# EAGLE board FbLike_EP2 (EAGLE 7.2.0)
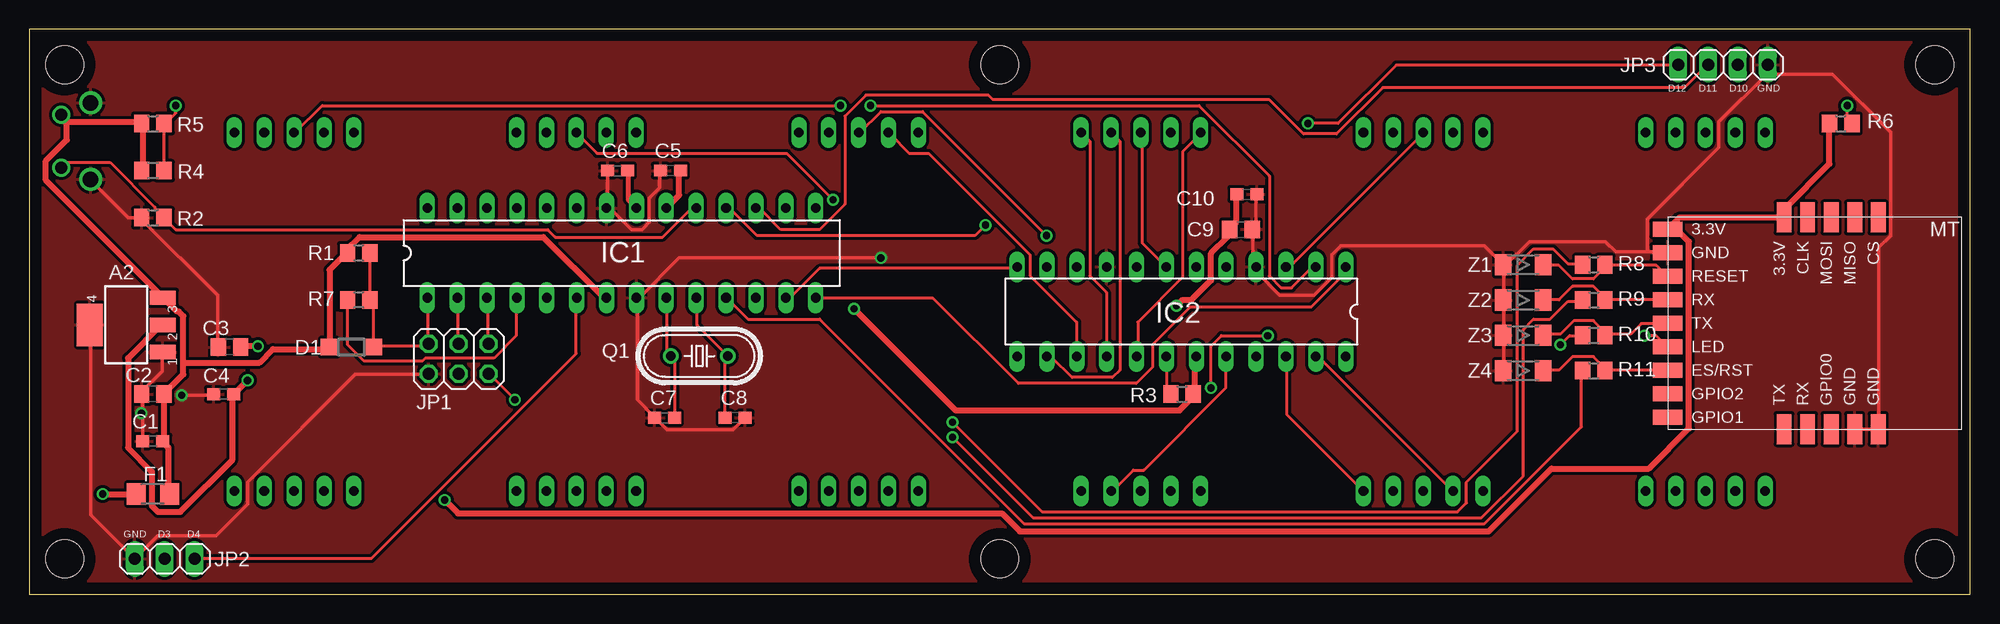
[diagram p0: board, top side]
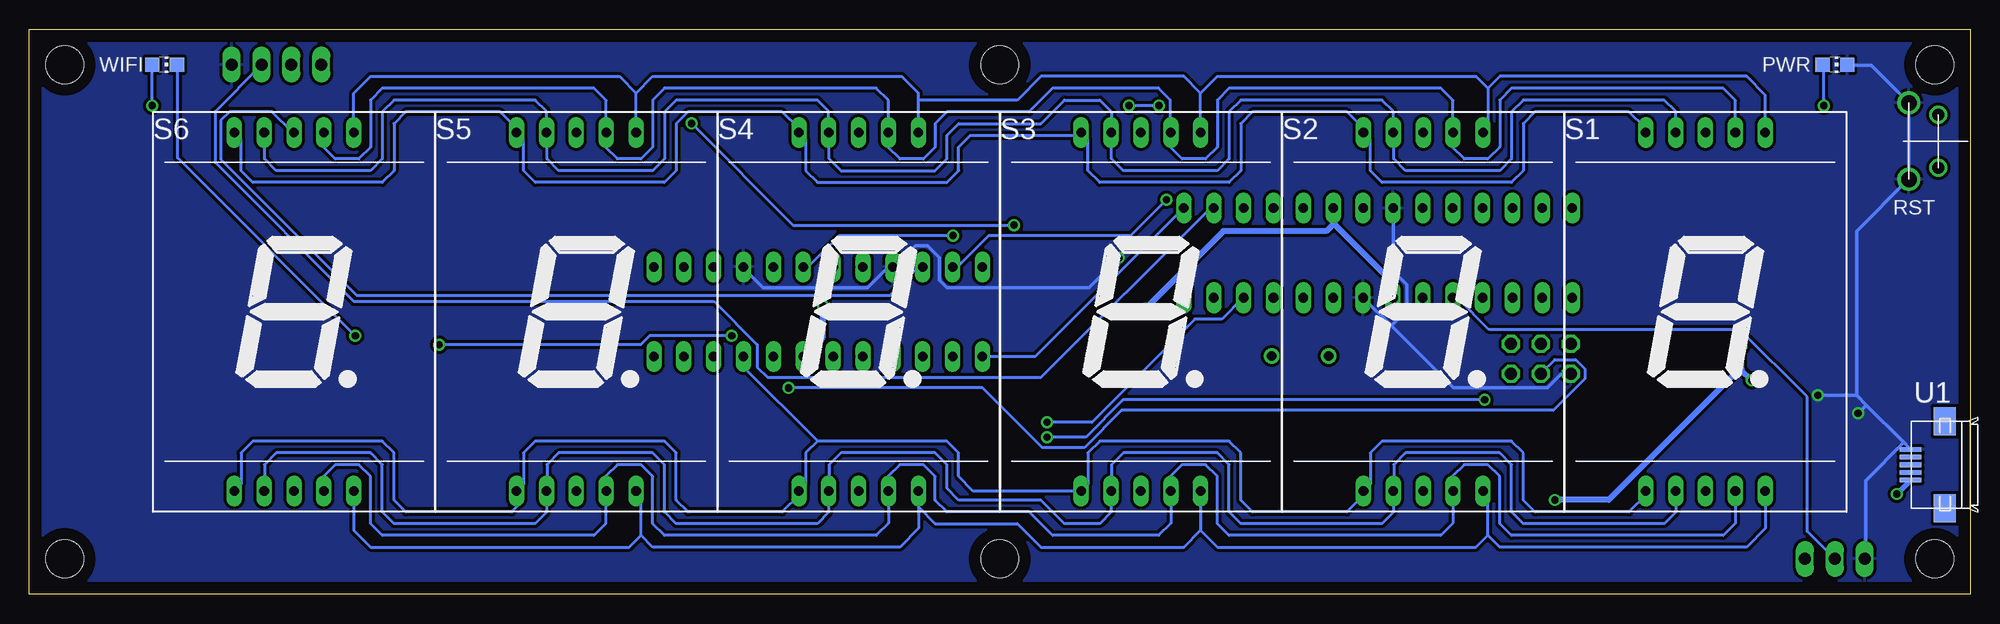
[diagram p1: board, bottom side, seen from below]

Size 165 x 48 mm. Coordinates in mm from the lower left corner, seen from the top.
Outline: 165,0 165,48 0,48 0,0 165,0
Copper layers (1*16): Top 0.035mm / dielectric 1.5mm / Bottom 0.035mm
Design rules "FbLike_EP2": minimum track width 10mil, minimum drill 24mil, track to track 0.205mm, track to pad 0.205mm, pad to pad 0.205mm, via to via 0.205mm, smd to smd 8mil, copper to edge 40mil, drill to drill 8mil, minimum pad ring 10mil, minimum via ring 8mil, stop-mask expansion 4mil, vias tented up to drill 0mil, thermal gap 10mil
Net classes: 0 default: width 0.254 mm, clearance 0.254 mm; 1 gnd: width 0.305 mm, drill 0.559 mm, clearance 0.254 mm; 2 aref: width 0.406 mm, drill 0.61 mm, clearance 0.254 mm; 3 usbvcc: width 0.508 mm, drill 0.61 mm, clearance 0.254 mm
Holes 3.2 mm at 3,3 82.5,45 3,45 82.5,3 162,45 162,3

## Footprints (pad centres in the part's own frame; a part is rotated, then mirrored left to right if it is on the bottom)
SOT223 = smd 1.219 x 2.235: 1 -2.311,-3.099; 2 0,-3.099; 3 2.311,-3.099 | smd 3.6 x 2.2: 4 0,3.099
C0603 = smd 1.1 x 1: 1 -0.85,0; 2 0.85,0
C0805 = smd 1.3 x 1.5: 1 -0.95,0; 2 0.95,0
SOD123 = smd 1.4 x 1.4: A 1.9,0; C -1.9,0
R1206 = smd 1.6 x 1.803: 1 -1.422,0; 2 1.422,0
DIL28-3 = drill 0.813 long: 1 -16.51,-3.81; 2 -13.97,-3.81; 3 -11.43,-3.81; 4 -8.89,-3.81; 5 -6.35,-3.81; 6 -3.81,-3.81; 7 -1.27,-3.81; 8 1.27,-3.81; 9 3.81,-3.81; 10 6.35,-3.81; 11 8.89,-3.81; 12 11.43,-3.81; 13 13.97,-3.81; 14 16.51,-3.81; 15 16.51,3.81; 16 13.97,3.81; 17 11.43,3.81; 18 8.89,3.81; 19 6.35,3.81; 20 3.81,3.81; 21 1.27,3.81; 22 -1.27,3.81; 23 -3.81,3.81; 24 -6.35,3.81; 25 -8.89,3.81; 26 -11.43,3.81; 27 -13.97,3.81; 28 -16.51,3.81
DIL24-3 = drill 0.813 long: 1 -13.97,-3.81; 2 -11.43,-3.81; 3 -8.89,-3.81; 4 -6.35,-3.81; 5 -3.81,-3.81; 6 -1.27,-3.81; 7 1.27,-3.81; 8 3.81,-3.81; 9 6.35,-3.81; 10 8.89,-3.81; 11 11.43,-3.81; 12 13.97,-3.81; 13 13.97,3.81; 14 11.43,3.81; 15 8.89,3.81; 16 6.35,3.81; 17 3.81,3.81; 18 1.27,3.81; 19 -1.27,3.81; 20 -3.81,3.81; 21 -6.35,3.81; 22 -8.89,3.81; 23 -11.43,3.81; 24 -13.97,3.81
2X03 = drill 1.016 octagon: 1 -2.54,-1.27; 2 -2.54,1.27; 3 0,-1.27; 4 0,1.27; 5 2.54,-1.27; 6 2.54,1.27
1X03 = drill 1.016 long: 1 -2.54,0; 2 0,0; 3 2.54,0
1X04 = drill 1.016 long: 1 -3.81,0; 2 -1.27,0; 3 1.27,0; 4 3.81,0
HLK-M35-PAD = smd 1.27 x 2.54: P$1 1,0; P$2 3,0; P$3 5,0; P$4 7,0; P$5 9,0; P$6 11,0; P$7 13,0; P$8 15,0; P$9 17,0 | smd 2.54 x 1.27: P$10 18,9.9; P$11 18,11.9; P$12 18,13.9; P$13 18,15.9; P$14 18,17.9; P$15 0,17.9; P$16 0,15.9; P$17 0,13.9; P$18 0,11.9; P$19 0,9.9
CHIP-LED0805 = smd 1.2 x 1.2: A 0,-1.05; C 0,1.05
HC49U-V = drill 0.813: 1 -2.413,0; 2 2.413,0
R0805 = smd 1.3 x 1.5: 1 -0.95,0; 2 0.95,0
BUTTON-6*6-90DEG = drill 1.3: P$1 -3.25,2.5; P$4 3.25,2.5 | drill 1: P$2 -2.25,0; P$3 2.25,0
7SEG-1INCH = drill 0.813 long: 1 -5.08,-15.24; 2 -2.54,-15.24; 3 0,-15.24; 4 2.54,-15.24; 5 5.08,-15.24; 6 5.08,15.24; 7 2.54,15.24; 8 0,15.24; 9 -2.54,15.24; 10 -5.08,15.24
MICRO-USB-B = smd 2.4 x 1.9: G@1 -3.7,1.45; G@2 3.7,1.45 | smd 0.4 x 1.85: P1 -1.3,4.375; P2 -0.65,4.375; P3 0,4.375; P4 0.65,4.375; P5 1.3,4.375
LL-34 = smd 1.4 x 1.8: 1 -1.7,0; 2 1.7,0

## Placement (x,y rotation side)
A2  3.3V  [SOT223]  8.24,22.88 90 top
C1  0.1uf  [C0603]  10.5,13 180 top
C2  10uf  [C0805]  10.5,17 180 top
C3  10uf  [C0805]  17.02,21 180 top
C4  0.1uf  [C0603]  16.5,17 180 top
C5  0.1uf  [C0603]  54.5,36 180 top
C6  0.1uf  [C0603]  50,36 0 top
C7  22pf  [C0603]  54,15 0 top
C8  22pf  [C0603]  60,15 180 top
C9  10uf  [C0805]  103,31 0 top
C10  0.1uf  [C0603]  103.5,34 0 top
D1  1N4148  [SOD123]  27.37,21 0 top
F1  0.5A  [R1206]  10.5,8.51 0 top
IC1  [DIL28-3]  50.34,29 0 top
IC2  [DIL24-3]  97.94,24 180 top
JP1  [2X03]  36.5,20 0 top
JP2  [1X03]  11.5,3 0 top
JP3  [1X04]  144,45 0 top
MT  HLK-M35-PAD  [HLK-M35-PAD]  139.28,32.02 270 top
PWR  RED  [CHIP-LED0805]  11.5,45 270 bottom
Q1  16Mhz  [HC49U-V]  56.96,20.24 180 top
R1  10K  [R0805]  28,29 0 top
R2  10K  [R0805]  10.5,32 0 top
R3  22.6K  [R0805]  98,17 0 top
R4  1K  [R0805]  10.5,36 180 top
R5  1K  [R0805]  10.5,40 0 top
R6  1K  [R0805]  154,40 0 top
R7  1K  [R0805]  28,25 180 top
R8  200  [R0805]  133,28 0 top
R9  200  [R0805]  133,25 0 top
R10  200  [R0805]  133,22 0 top
R11  200  [R0805]  133,19 0 top
RST  BUTTON-66-90DEG  [BUTTON-6*6-90DEG]  2.7,38.5 90 bottom
S1  [7SEG-1INCH]  22.5,24 0 bottom
S2  [7SEG-1INCH]  46.5,24 0 bottom
S3  [7SEG-1INCH]  70.5,24 0 bottom
S4  [7SEG-1INCH]  94.5,24 0 bottom
S5  [7SEG-1INCH]  118.5,24 0 bottom
S6  [7SEG-1INCH]  142.5,24 0 bottom
U1  [MICRO-USB-B]  0.7,11 90 bottom
WIFI  BLUE  [CHIP-LED0805]  153.5,45 270 bottom
Z1  3.3V  [LL-34]  127,28 180 top
Z2  3.3V  [LL-34]  127,25 180 top
Z3  3.3V  [LL-34]  127,22 180 top
Z4  3.3V  [LL-34]  127,19 180 top

## Library data of the parts
A2 MT U1 Z1-Z4 = MyProLike
C1-C10 R1-R11 = rcl
D1 = diode
F1 = adafruit
IC1 = MyProLike; OC_FARNELL: unknown; OC_NEWARK: unknown
IC2 = maxim; MF: MAXIM; MPN: MAX7219CNG; OC_FARNELL: 1523914; OC_NEWARK: 34C4018
JP1-JP3 = pinhead
PWR WIFI = led
Q1 = crystal; OC_FARNELL: 1666969; OC_NEWARK: unknown
RST S1-S6 = My7Segment

## Nets
+3V3 [usbvcc]: A2.2 C3.1 C4.1 MT.P$1 MT.P$19 R6.1
+5V [usbvcc]: A2.3 C1.1 C2.1 C5.1 C9.1 C10.1 D1.C F1.2 IC1.7 IC1.20 IC2.19 R1.1 R3.2 R4.2 R5.1 RST.P$3
BTN_RST: IC1.19 R2.2 RST.P$2
GND: A2.1 A2.4 C1.2 C2.2 C3.2 C4.2 C5.2 C6.1 C7.1 C8.1 C9.2 C10.2 IC1.8 IC1.22 IC2.4 IC2.9 JP1.1 JP2.1 JP3.4 MT.P$2 MT.P$13 MT.P$14 PWR.C R2.1 RST.P$1 RST.P$4 U1.P5 Z1.2 Z2.2 Z3.2 Z4.2
IC1_RESET: IC1.4 R7.2
IC2_CLK: IC1.15 IC2.13
IC2_DIN: IC1.14 IC2.1
IC2_LOAD: IC1.13 IC2.12
JP1_P2: D1.A IC1.1 JP1.2 R1.2 R7.1
JP1_P4: IC1.2 JP1.4
JP1_P6: IC1.3 JP1.6
JP2_P2: IC1.5 JP2.2
JP2_P3: IC1.6 JP2.3
JP3_P1: IC1.18 JP3.1
JP3_P2: IC1.17 JP3.2
JP3_P3: IC1.16 JP3.3
M35_ES: IC1.11 R11.1
M35_RESET: IC1.12 R8.1
N$1: R6.2 WIFI.A
N$3 [aref]: C6.2 IC1.21
N$4: C7.2 IC1.9 Q1.2
N$5: C8.2 IC1.10 Q1.1
N$6: IC2.14 S1.7 S2.7 S3.7 S4.7 S5.7 S6.7
N$7: IC2.16 S1.6 S2.6 S3.6 S4.6 S5.6 S6.6
N$8: IC2.20 S1.4 S2.4 S3.4 S4.4 S5.4 S6.4
N$9: IC2.23 S1.2 S2.2 S3.2 S4.2 S5.2 S6.2
N$10: IC2.21 S1.1 S2.1 S3.1 S4.1 S5.1 S6.1
N$11: IC2.10 S6.8
N$12: IC2.15 S1.9 S2.9 S3.9 S4.9 S5.9 S6.9
N$13: IC2.17 S1.10 S2.10 S3.10 S4.10 S5.10 S6.10
N$14: IC2.22 S1.5 S2.5 S3.5 S4.5 S5.5 S6.5
N$15: IC2.3 S5.8
N$16: IC2.7 S4.8
N$17: IC2.6 S3.8
N$18: IC2.11 S2.8
N$19: IC2.2 S1.8
N$20: JP1.5 R9.1
N$21: JP1.3 R10.1
N$22: MT.P$3 R8.2 Z1.1
N$23: IC2.18 R3.1
N$24: MT.P$4 R9.2 Z2.1
N$25: MT.P$5 R10.2 Z3.1
N$26: MT.P$7 R11.2 Z4.1
N$29: PWR.A R4.1 R5.2
WIFI_LED: MT.P$6 WIFI.C
XUSB [gnd]: F1.1 U1.P1

## Tracks (layer width: path | path; a pad name or v marks a point on that pad's centre or on a via)
+3V3  (via drill 0.61)
  Top 0.508: R6.1 153.03,39.88 153.03,36.58 149.22,32.77 149.22,32.26 MT.P$19 140.28,32.02 MT.P$1 139.83,31.24 141.1,29.97 141.1,14.1 137.67,10.67 129.41,10.67 124.08,5.33 84.2,5.33 82.68,6.86 36.45,6.86 v35.31,8 | A2.2 11.3,22.99 8.38,20.07 8.38,12.45 10.41,10.41 10.41,7.49 10.92,6.99 12.83,6.99 17.27,11.43 17.27,16.89 C4.1 17.53,17.14 v18.54,18.16 | v19.43,21.08 18.03,21.08 C3.1
  Bottom 0.508: 19.43,19.18 19.43,19.05 v18.54,18.16 | 19.43,19.18 v19.43,21.08 | v35.31,8 30.73,8 19.56,19.18 19.43,19.18
+5V  (via drill 0.61)
  Top 0.508: C10.1 102.62,33.91 102.62,31.62 102.11,31.11 C9.1 101.85,30.86 101.85,30.35 100.46,28.96 100.46,26.67 98.81,25.02 98.04,25.02 v97.54,24.51 | IC2.19 99.19,20.07 99.06,19.94 99.06,17.02 R3.2 98.93,16.76 97.79,15.62 78.74,15.62 v70.1,24.26 | C5.1 55.24,35.94 55.24,33.91 54.23,32.89 IC1.20 | R4.2 9.65,36.07 9.65,39.88 R5.1 9.4,40.13 3.3,40.13 | 3.3,40.13 2.79,40.64 RST.P$3 | F1.2 11.81,8.51 11.81,12.45 11.43,12.83 C1.1 11.43,13.08 11.43,16.89 C2.1 11.56,17.14 13.08,18.67 13.08,19.68 | 13.08,19.68 13.08,23.62 12.7,24 12.57,24 11.43,25.15 A2.3 11.18,25.4 1.4,35.18 1.4,36.83 3.17,38.61 3.17,40.01 3.3,40.13 | 13.08,19.68 19.56,19.68 20.7,20.83 25.27,20.83 D1.C 25.53,21.08 25.53,27.56 26.92,28.96 R1.1 26.92,29.21 28.07,30.35 43.69,30.35 48.77,25.27 49.02,25.27 IC1.7
  Bottom 0.508: v97.54,24.51 97.54,21.84 99.19,20.19 IC2.19 | 54.1,31.5 49.15,26.54 49.15,25.27 IC1.7 | 54.1,31.5 54.1,32.77 IC1.20 | v70.1,24.26 63.5,30.86 54.74,30.86 54.1,31.5
BTN_RST
  Top 0.254: RST.P$2 2.79,36.32 3.17,36.7 6.86,36.7 10.67,32.89 10.67,32.77 11.43,32 R2.2 11.56,31.88 12.45,30.99 44.07,30.99 44.7,30.35 53.85,30.35 56.26,32.77 56.64,32.77 IC1.19
GND  (via drill 0.61)
  Top 0.305: MT.P$13 MT.P$14 157.23,14.1 157.23,29.46 158.24,30.48 158.24,39.24 153.29,44.2 147.83,44.2 JP3.4 147.7,44.96 147.7,44.2 143.64,40.13 143.64,37.97 137.54,31.88 137.54,29.08 | C10.2 104.27,33.91 104.27,31.37 104.01,31.11 C9.2 104.01,30.86 104.01,28.07 104.27,27.81 IC2.4 104.39,27.69 104.39,27.3 106.3,25.4 109.22,25.4 110.74,26.92 110.74,28.83 111.51,29.59 123.7,29.59 125.22,28.07 Z1.2 | Z4.2 125.35,19.05 125.35,21.97 Z3.2 125.35,22.1 125.35,24.89 Z2.2 125.35,25.02 125.35,27.94 Z1.2 | 137.54,29.08 134.87,29.08 133.99,29.97 127.51,29.97 125.48,27.94 Z1.2 | 137.54,29.08 139.19,29.08 MT.P$2 | C6.1 49.15,35.94 49.15,32.89 IC1.22 49.28,32.89 51.18,30.99 52.07,30.99 52.7,31.62 52.7,33.66 53.59,34.54 53.59,35.94 C5.2 | C8.1 60.83,14.99 59.82,13.97 54.23,13.97 53.21,14.99 C7.1 53.09,15.11 51.69,16.51 51.69,25.15 IC1.8 51.82,25.15 55.24,28.57 v72.39,28.57 | 9.65,15.37 9.65,16.89 C2.2 9.53,17.14 11.3,18.92 11.3,20.45 A2.1 | 9.65,15.37 9.65,13.08 C1.2 | v12.95,16.89 15.62,16.89 C4.2 | A2.4 5.21,22.86 5.21,6.73 8.89,3.05 JP2.1 9.02,3.05 10.92,4.95 15.88,4.95 18.54,7.62 18.54,9.53 27.69,18.67 33.91,18.67 JP1.1 | v9.53,15.37 9.65,15.37 | RST.P$1 5.21,35.18 8.38,32 9.53,32 R2.1 9.53,31.88 16,25.4 16,21.08 C3.2
  Bottom 0.305: IC2.4 104.27,27.69 102.62,26.04 93.73,26.04 92.08,27.69 91.69,27.69 IC2.9 91.44,27.81 89.66,29.59 88.65,29.59 87.63,28.57 87.63,26.67 87,26.04 74.93,26.04 v72.39,28.57 | 49.21,22.8 51.56,25.15 IC1.8 | 49.21,22.8 43.94,17.53 35.94,17.53 34.8,18.67 34.04,18.67 JP1.1 | 49.21,22.8 47.88,24.13 47.88,26.29 49.02,27.43 49.02,32.77 IC1.22 | 9.65,16.89 v12.95,16.89 | 5.65,12.89 5.08,12.32 U1.P5 | 5.65,12.89 8.83,16.07 | 8.83,16.07 9.65,16.89 | 5.65,12.89 8.89,9.65 8.89,3.05 JP2.1 | 8.83,16.07 v9.53,15.37 | PWR.C 10.41,44.96 8.38,44.96 5.21,41.78 RST.P$4 5.21,41.66 5.21,35.31 RST.P$1 5.33,35.18 9.65,30.86 9.65,16.89
  pour Top (isolate 0.016): 0,48 0,0 165,0 165,48
  pour Bottom (isolate 0.016): 1,47 1,1 164,1 164,47
IC1_RESET
  Top 0.254: R7.2 27.05,24.89 27.05,21.21 28.45,19.81 33.4,19.81 33.66,20.07 39.5,20.07 41.4,21.97 41.4,25.15 IC1.4
IC2_CLK
  Bottom 0.254: IC2.13 83.95,20.19 79.5,20.19 66.93,32.77 IC1.15
IC2_DIN
  Top 0.254: IC1.14 66.93,25.15 76.83,25.15 84.07,17.91 94.11,17.91 95.5,19.3 95.5,21.21 98.68,24.38 108.97,24.38 111.89,27.3 111.89,27.69 IC2.1
IC2_LOAD
  Top 0.254: IC1.13 64.39,25.27 64.77,25.27 67.18,27.69 83.95,27.69 IC2.12
JP1_P2
  Top 0.254: R1.2 28.96,28.96 28.96,25.02 R7.1 28.96,24.89 29.21,24.64 29.21,21.08 D1.A 29.34,21.08 33.53,21.08 33.78,21.34 JP1.2 33.91,21.34 33.91,25.15 IC1.1
JP1_P4
  Top 0.254: IC1.2 36.45,25.15 36.45,21.34 JP1.4
JP1_P6
  Top 0.254: IC1.3 38.99,25.15 38.99,21.34 JP1.6
JP2_P2
  Bottom 0.254: IC1.5 43.94,25.15 43.56,25.15 40.89,22.48 19.56,22.48 13.84,16.76 13.84,5.33 11.56,3.05 JP2.2
JP2_P3
  Top 0.254: IC1.6 46.48,25.15 46.48,20.45 29.08,3.05 14.1,3.05 JP2.3
JP3_P1  (via drill 0.61)
  Top 0.254: v81.28,31.37 80.39,30.48 61.85,30.48 59.56,32.77 59.31,32.77 IC1.18 | v108.71,40.01 111.25,40.01 116.2,44.96 140.08,44.96 JP3.1
  Bottom 0.254: v81.28,31.37 100.08,31.37 v108.71,40.01
JP3_P2
  Top 0.254: IC1.17 61.85,32.77 62.1,32.77 63.88,30.99 67.18,30.99 69.34,33.15 69.34,40.64 71.12,42.42 81.53,42.42 81.92,42.04 105.41,42.04 108.33,39.12 111.12,39.12 115.06,43.05 140.72,43.05 142.62,44.96 JP3.2
JP3_P3
  Bottom 0.254: IC1.16 64.39,32.77 64.64,32.77 78.99,18.41 102.23,18.41 103.12,19.3 103.12,21.21 106.81,24.89 137.41,24.89 149.22,36.7 149.22,41.02 145.29,44.96 JP3.3
M35_ES
  Top 0.254: R11.1 131.95,18.92 131.95,14.22 123.7,5.97 84.58,5.97 67.18,23.37 61.09,23.37 59.31,25.15 IC1.11
M35_RESET  (via drill 0.61)
  Top 0.254: v78.49,14.61 86.11,6.99 121.41,6.99 122.17,7.75 122.17,9.53 126.49,13.84 126.49,27.94 127.89,29.34 129.54,29.34 130.81,28.07 131.95,28.07 R8.1
  Bottom 0.254: v78.49,14.61 74.68,14.61 65.91,23.37 63.63,23.37 61.85,25.15 IC1.12
N$1  (via drill 0.61)
  Top 0.254: v154.56,41.53 154.56,40.39 R6.2
  Bottom 0.254: v154.56,41.53 154.56,44.96 WIFI.A
N$3
  Top 0.406: C6.2 50.93,35.94 50.93,33.53 51.56,32.89 IC1.21
N$4
  Top 0.254: C7.2 54.85,19.94 Q1.2 54.48,20.32 54.23,20.57 54.23,25.15 IC1.9
N$5
  Top 0.254: C8.2 59.15,20.02 Q1.1 59.31,20.32 56.77,22.86 56.77,25.15 IC1.10
N$6
  Top 0.254: IC2.14 86.61,20.07 87,20.07 88.65,18.41 92.08,18.41 92.71,19.05 92.71,38.48 92.08,39.12 S4.7
  Bottom 0.254: S1.7 19.96,41.96 21,43 39,43 40,42 40,38 41,37 43,37 44,38 44,39.2 S2.7 43.96,41.96 45,43 63,43 64,42 64,38 65,37 67,37 68,38 68,39.2 | 68,39.2 S3.7 | S6.7 140,39.2 140,38 139,37 137,37 136,38 136,42 135,43 117,43 115.96,41.96 S5.7 116,39.2 116,38 115,37 113,37 112,38 112,42 111,43 93,43 91.96,41.96 S4.7 92,39.2 92,38 91,37 89,37 88,38 88,40 87,41 80,41 78,43 69,43 68,42 68,39.2
N$7
  Top 0.254: IC2.16 91.57,20.19 91.57,25.65 90.17,27.05 90.17,38.48 89.53,39.12 S4.6
  Bottom 0.254: S1.6 17.42,42.42 19,44 40,44 41,43 | 41,43 41,39.66 S2.6 | S3.6 65.42,42.58 | 65.42,42.58 64,44 42,44 41,43 | S4.6 89.42,42 | 89.42,42 89.42,42.58 90.84,44 112,44 113.42,42.58 | S5.6 113.42,42.58 | S6.6 137.42,42.58 136,44 114.84,44 113.42,42.58 | 65.42,42.58 66.84,44 79,44 81,42 89.42,42
N$8
  Top 0.254: IC2.20 101.73,20.07 101.73,17.53 94.74,10.54 93.85,10.54 92.08,8.76 S4.4
  Bottom 0.254: S1.4 19.96,6.04 21,5 39,5 40,6 40,10 41,11 43,11 44,10 44,8.8 S2.4 43.96,6.04 45,5 63,5 64,6 64,10 65,11 67,11 68,10 68,8.8 S3.4 67.96,6.04 69,5 78,5 80,7 87,7 88,8 88,10 89,11 91,11 92,10 92,8.8 S4.4 91.96,6.04 93,5 111,5 112,6 112,10 113,11 115,11 116,10 116,8.8 | 116,8.8 S5.4 | 116,8.8 116,6 117,5 135,5 136,6 136,10 137,11 139,11 140,10 140,8.8 S6.4
N$9
  Top 0.254: IC2.23 109.47,20.07 109.73,20.07 S5.2
  Bottom 0.254: S1.2 25.04,6.96 26,6 38,6 39,7 39,11 40,12 48,12 49,11 49,8.8 S2.2 49.04,6.96 50,6 62,6 63,7 63,11 64,12 72,12 73,11 73,8.8 S3.2 73.04,6.96 74,6 77,6 79,8 86,8 87,9 87,11 88,12 96,12 97,11 97,8.8 S4.2 97.04,6.96 98,6 110,6 111,7 111,11 112,12 120,12 121,11 121,8.8 S5.2 121.04,6.96 122,6 134,6 135,7 135,11 136,12 144,12 145,11 145,8.8 S6.2
N$10
  Bottom 0.254: S1.1 27.58,8.42 29,7 37,7 38,8 38,12 39,13 50,13 51,12 51,9.34 S2.1 51.58,8.42 53,7 61,7 62,8 62,12 63,13 74,13 75,12 75,9.34 S3.1 84.76,8.76 86,10 86,12 87,13 98,13 | 98,13 99,12 99,9.34 S4.1 99.58,8.42 101,7 109,7 110,8 110,12 111,13 122,13 123,12 123,9.34 S5.1 123.58,7.42 124,7 133,7 134,8 134,12 135,13 146,13 147,12 147,9.34 S6.1 | IC2.21 104.27,20.07 104.27,19.3 98.04,13.08 98,13
N$11
  Bottom 0.254: IC2.10 89.15,27.69 89.53,27.69 91.82,25.4 137.16,25.4 148.72,36.96 148.72,40.26 147.96,41.02 144.4,41.02 142.62,39.24 S6.8
N$12
  Top 0.254: IC2.15 89.03,20.19 89.03,23.11 85.09,27.05 85.09,28.83 76.45,37.47 74.8,37.47 73.15,39.12 S3.9
  Bottom 0.254: S1.9 25.04,41.04 26,42 38,42 39,41 39,37 40,36 48,36 49,37 49,39.2 S2.9 49.04,41.04 50,42 62,42 63,41 63,37 64,36 72,36 73,37 73,39.2 S3.9 73,39.28 73,41 74,42 77,42 79,40 86,40 87,39 87,37 88,36 96,36 97.04,37.04 S4.9 97.04,41.04 98,42 110,42 111,41 111,37 112,36 120,36 121,37 121,39.2 S5.9 121.04,41.04 122,42 134,42 135,41 135,37 136,36 144,36 145,37 145,39.2 S6.9
N$13
  Top 0.254: IC2.17 94.23,20.19 94.23,23.11 98.04,26.92 98.04,37.59 99.57,39.12 S4.10
  Bottom 0.254: S1.10 27.58,39.58 29,41 37,41 38,40 38,36 39,35 50,35 51,36 51,38.66 S2.10 51.58,39.58 53,41 61,41 62,40 62,36 63,35 74,35 75,36 75,38.66 S3.10 75.82,39 85,39 86,38 86,36 87,35 98,35 99,36 99,38.66 S4.10 99.58,39.58 101,41 109,41 110,40 110,36 111,35 122,35 123,36 123,38.66 S5.10 123.58,39.58 125,41 133,41 134,40 134,36 135,35 146,35 147,36 147,38.66 S6.10
N$14
  Top 0.254: IC2.22 106.93,20.07 106.93,15.24 S5.5
  Bottom 0.254: S1.5 17.42,5.58 19,4 40,4 41,5 | 41,5 41,8.34 S2.5 | S3.5 65.42,5.42 | 65.42,5.42 64,4 42,4 41,5 | 65.42,5.42 66.84,4 79,4 81,6 88,6 89.42,7.42 S4.5 89.42,5.58 91,4 112,4 113,5 | 113,5 113,8.34 S5.5 | S6.5 137.42,5.42 136,4 114,4 113,5
N$15
  Top 0.254: IC2.3 106.93,27.81 107.19,27.81 118.49,39.12 S5.8
N$16
  Top 0.254: S4.8 94.61,39.12 94.61,29.84 96.65,27.81 IC2.7
N$17  (via drill 0.61)
  Top 0.254: v86.49,30.48 75.95,41.02 72.39,41.02 70.61,39.24 S3.8
  Bottom 0.254: v86.49,30.48 96.14,30.48 98.81,27.81 99.19,27.81 IC2.6
N$18  (via drill 0.61)
  Top 0.254: v68.33,33.53 64.39,37.47 48.26,37.47 46.61,39.12 S2.8
  Bottom 0.254: v68.33,33.53 71.37,30.48 83.44,30.48 86.11,27.81 86.49,27.81 IC2.11
N$19  (via drill 0.61)
  Top 0.254: v71.5,41.53 99.44,41.53 105.41,35.56 105.41,27.05 106.43,26.04 107.31,26.04 108.97,27.69 109.35,27.69 IC2.2 | v68.96,41.53 24.89,41.53 22.61,39.24 S1.8
  Bottom 0.254: v68.96,41.53 v71.5,41.53
N$20  (via drill 0.61)
  Top 0.254: v78.49,13.34 85.34,6.48 123.44,6.48 127,10.03 127,22.48 127.89,23.37 129.29,23.37 130.81,24.89 131.95,24.89 R9.1 | v41.27,16.51 39.12,18.67 JP1.5
  Bottom 0.254: v78.49,13.34 75.18,13.34 72.01,16.51 v41.27,16.51
N$21  (via drill 0.61)
  Top 0.254: v130.18,21.21 130.94,21.97 131.95,21.97 R10.1 | v105.28,21.97 101.35,21.97 100.46,21.08 v100.46,17.53
  Bottom 0.254: v130.18,21.21 113.03,21.21 112.27,21.97 v105.28,21.97 | v100.46,17.53 83.95,17.53 78.87,12.45 75.31,12.45 72.14,15.62 35.43,15.62 32.77,18.29 32.77,19.18 33.53,19.94 35.31,19.94 36.45,18.8 JP1.3
N$22
  Top 0.254: MT.P$3 139.19,27.05 138.3,27.94 133.99,27.94 R8.2 133.99,27.81 132.97,26.8 131.19,26.8 130.05,27.94 128.78,27.94 Z1.1
N$23
  Top 0.254: IC2.18 96.67,17 R3.1
N$24
  Top 0.254: MT.P$4 139.19,25.02 133.99,25.02 R9.2 133.99,25.15 132.97,26.16 131.19,26.16 130.05,25.02 128.78,25.02 Z2.1
N$25
  Top 0.254: MT.P$5 139.19,22.99 137.03,22.99 136.14,22.1 133.99,22.1 R10.2 133.99,22.23 132.97,23.24 131.32,23.24 130.18,22.1 128.78,22.1 Z3.1
N$26
  Top 0.254: MT.P$7 139.19,19.05 133.99,19.05 R11.2 133.99,19.18 132.97,20.19 131.19,20.19 130.05,19.05 128.78,19.05 Z4.1
N$29  (via drill 0.61)
  Top 0.254: R4.1 R5.2 11.56,40.01 12.45,40.89 v12.45,41.53
  Bottom 0.254: v12.45,41.53 12.45,44.96 PWR.A
WIFI_LED  (via drill 0.61)
  Top 0.254: v137.29,21.97 138.3,21.97 139.19,21.08 MT.P$6
  Bottom 0.254: v137.29,21.97 152.4,37.08 152.4,44.96 WIFI.C
XUSB  (via drill 0.61)
  Top 0.305: 9.02,8.51 F1.1
  Top 0.508: v6.22,8.51 9.02,8.51
  Bottom 0.305: 5.08,9.65 U1.P1
  Bottom 0.406: 5.08,9.65 v6.22,8.51

## Text on the board
tNames: D12 | D11 | D10 | GND | GND | D3 | D4
tTest: (3,45) | (83,45) | (162,45) | (3,3) | (83,3) | (162,3)